# Altium PCB Chocolate_Vending_Machine_V3.2.PcbDoc
Units mil, origin at the board's own origin, x right, y up, seen from the top; angles counter-clockwise.
Board outline 3433.09 x 3078.74 mil, 2 copper layers (Top Layer, Bottom Layer); 16 components, 21 nets, 129 pads, 18 vias.
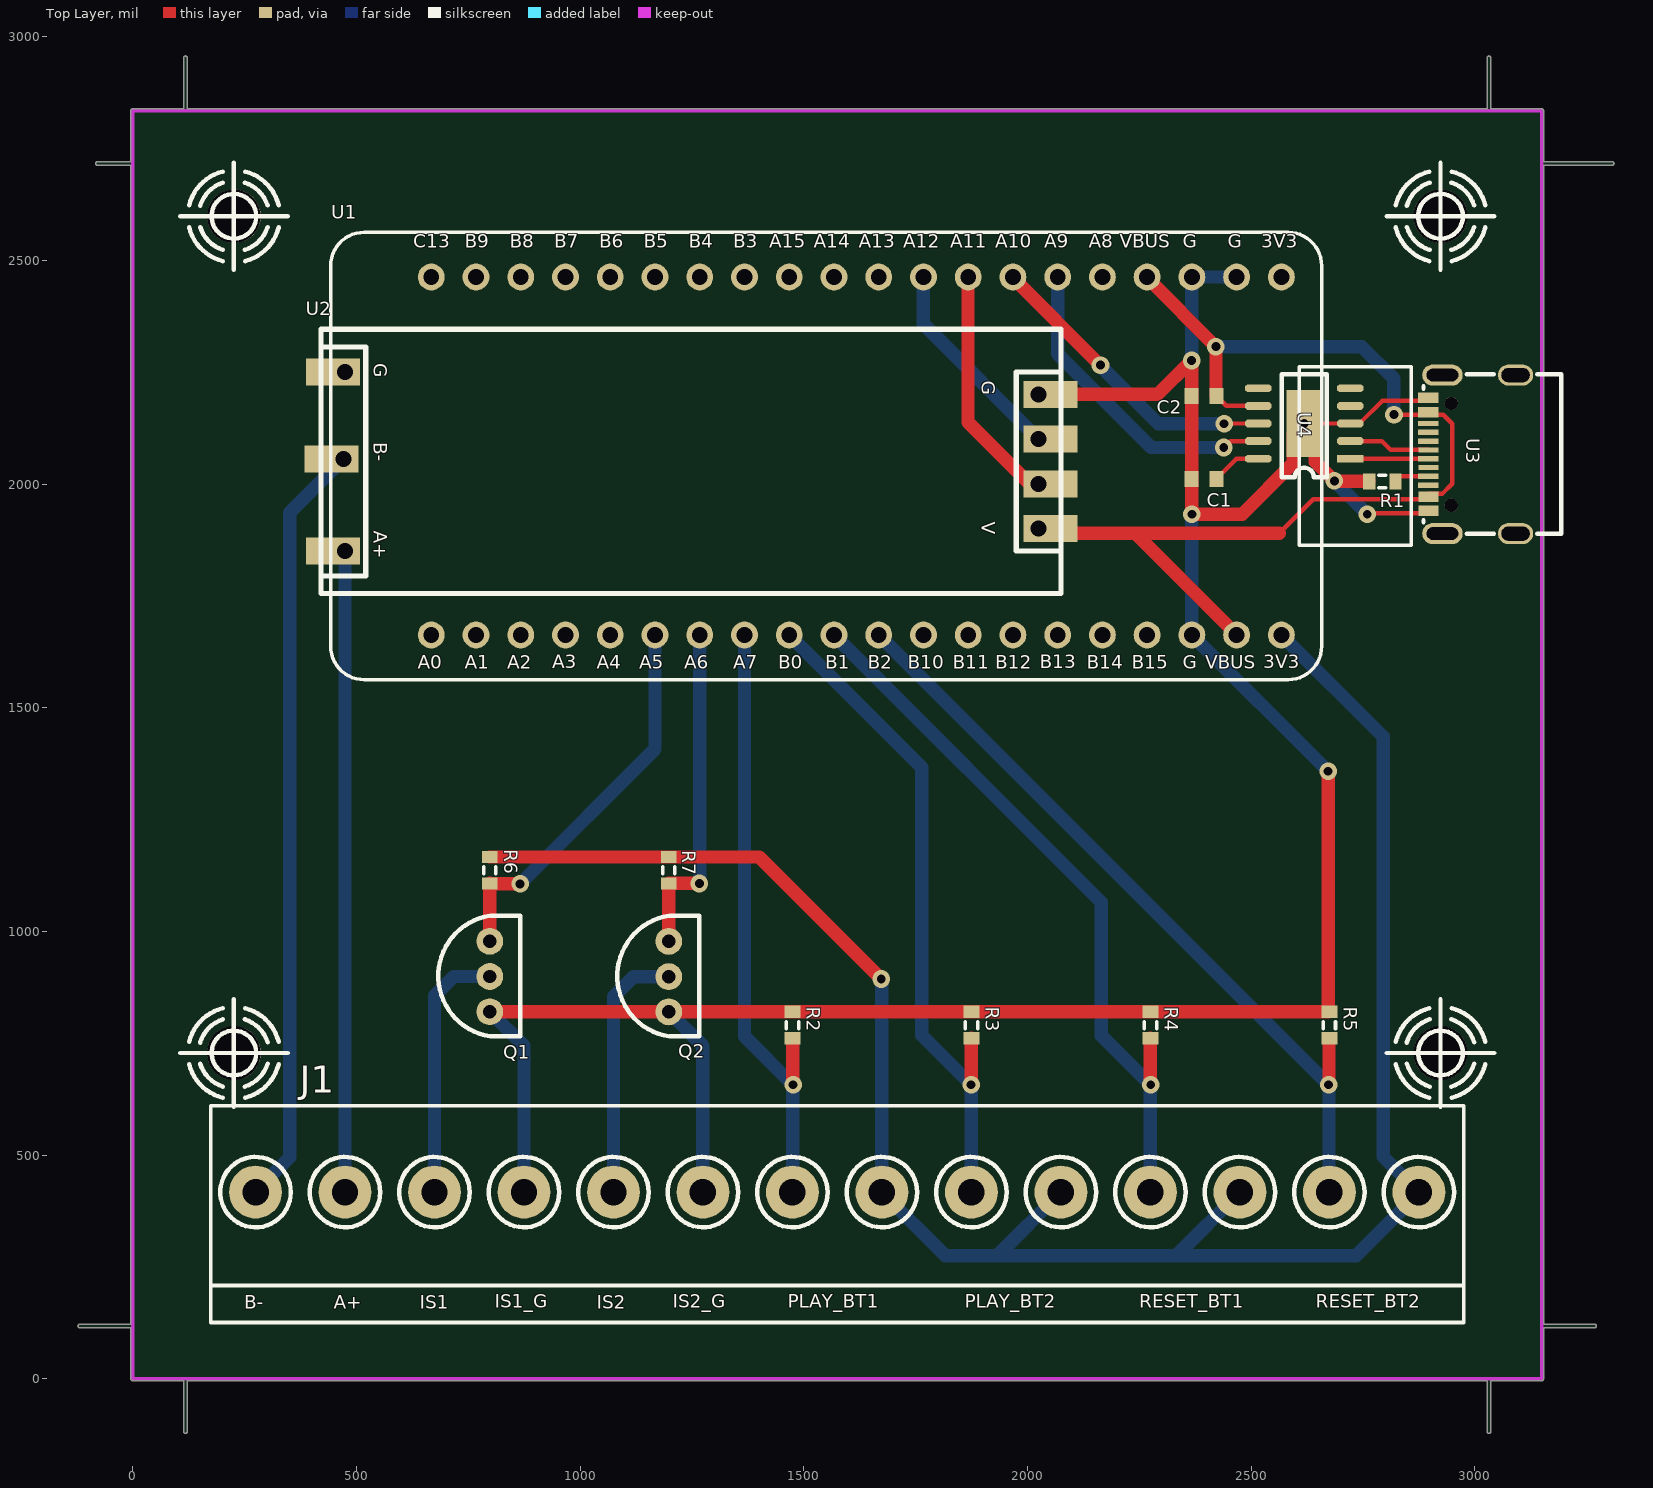
[diagram p0: Top Layer view]
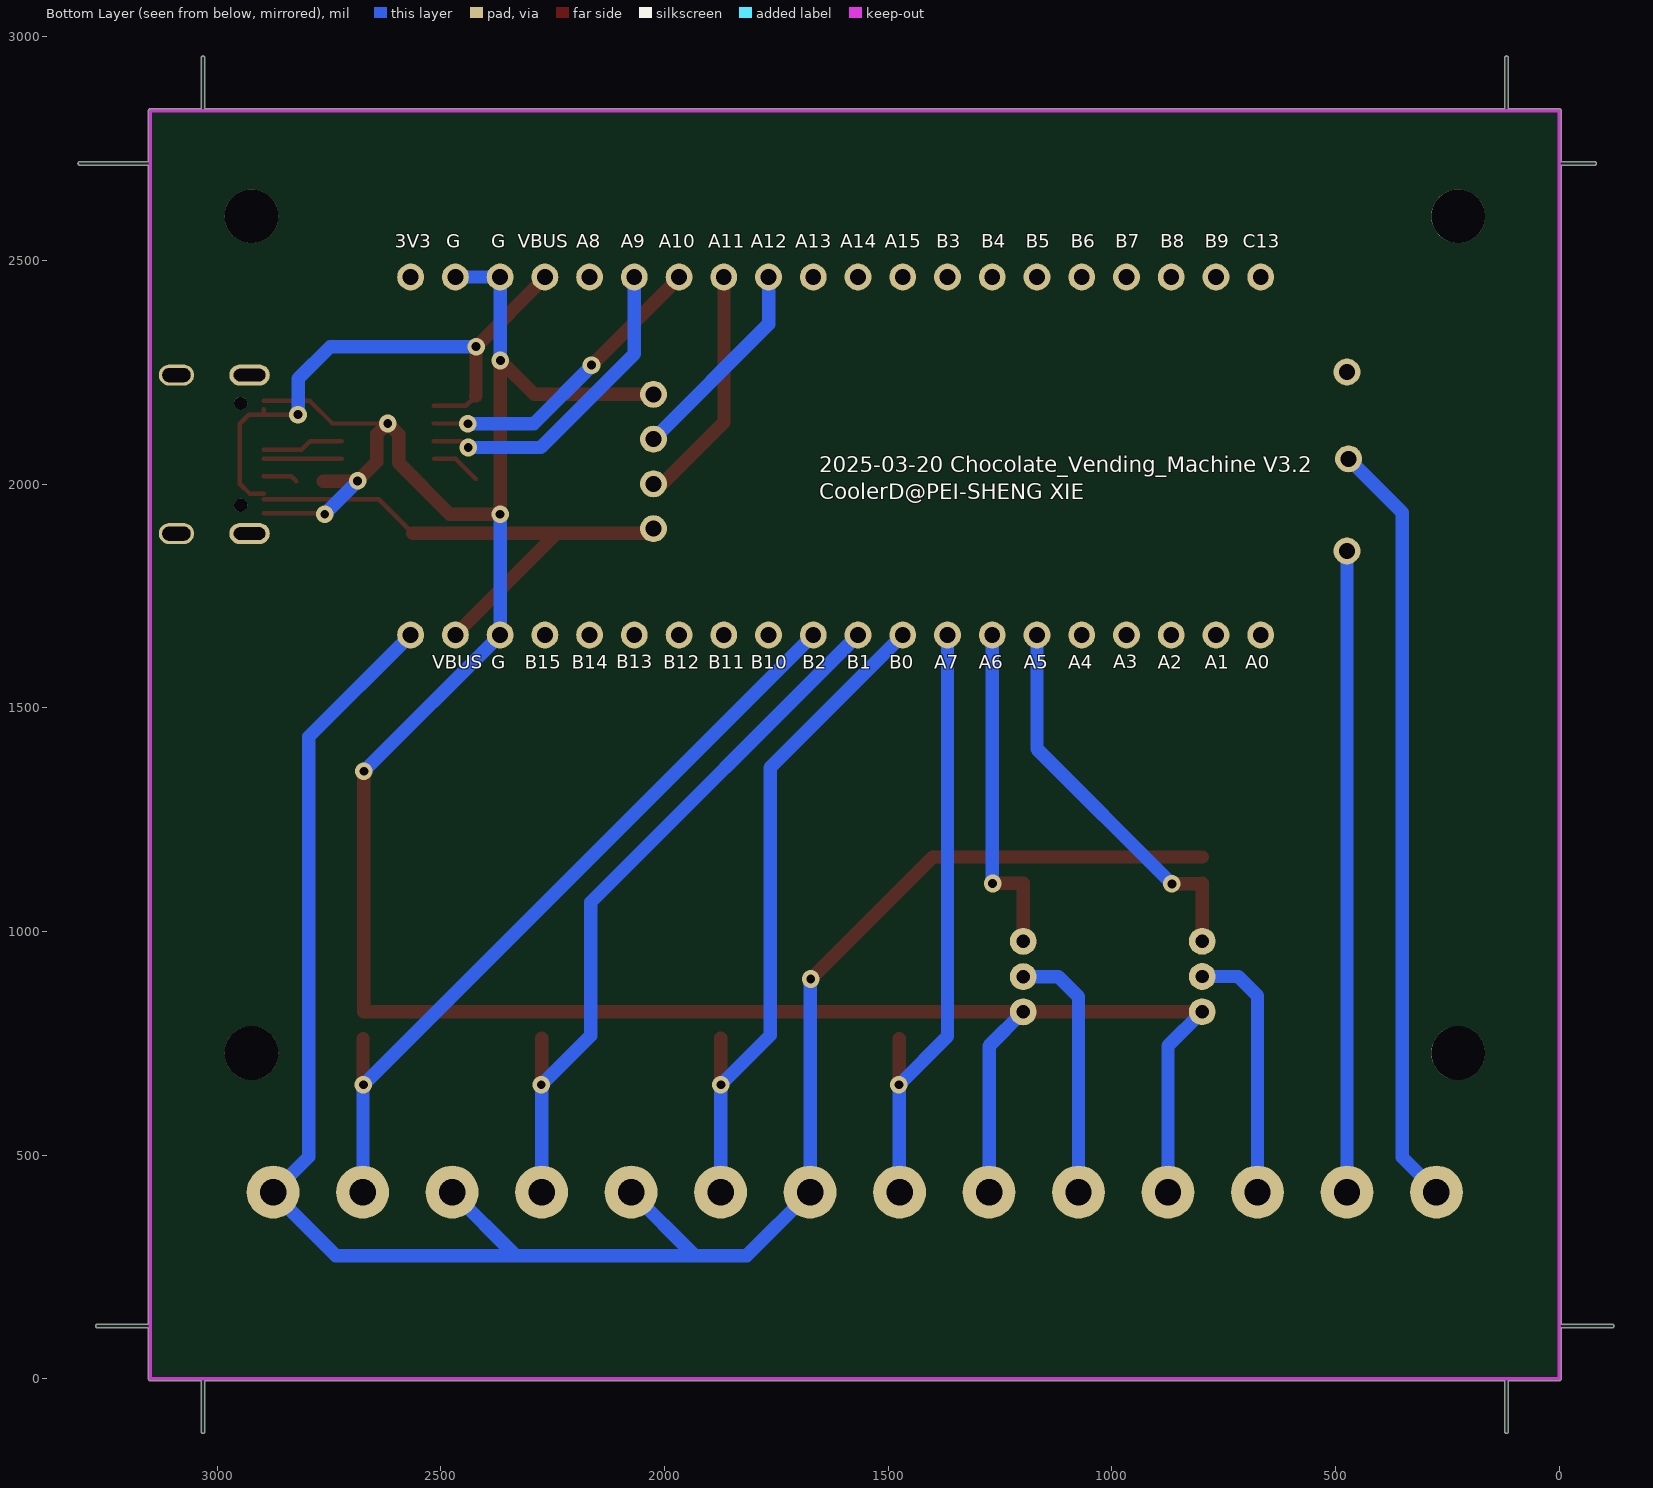
[diagram p1: Bottom Layer view, seen from below]

## Layer stack, top to bottom
Top Solder: solder mask 0.4, Solder Resist, Dk 3.5
Top Layer: signal copper 1.4
Dielectric 1: dielectric 12.6, FR-4, Dk 4.8
Bottom Layer: signal copper 1.4
Bottom Solder: solder mask 0.4, Solder Resist, Dk 3.5

## Board outline
-3.95,0 -3.95,114.16 -118.11,114.16 cw(c-118.11,118.11) -118.11,122.06 -3.95,122.06 -3.95,2712.58 -78.74,2712.58 cw(c-78.74,2716.54) -78.74,2720.49 -3.95,2720.49 -3.95,2834.65 cw(c0,2834.65) 0,2838.6 114.16,2838.6 114.16,2952.76 cw(c118.11,2952.76) 122.06,2952.76 122.06,2838.6 3027.54,2838.6 3027.54,2952.76 cw(c3031.5,2952.76) 3035.45,2952.76 3035.45,2838.6 3149.61,2838.6 cw(c3149.61,2834.65) 3153.56,2834.65 3153.56,2720.49 3307.09,2720.49 cw(c3307.09,2716.54) 3311.04,2716.54 cw(c3307.09,2716.54) 3307.09,2712.58 3153.56,2712.58 3153.56,122.06 3267.72,122.06 cw(c3267.72,118.11) 3271.67,118.11 cw(c3267.72,118.11) 3267.72,114.16 3153.56,114.16 3153.56,0 cw(c3149.61,0) 3149.61,-3.95 3035.45,-3.95 3035.45,-118.11 cw(c3031.5,-118.11) 3027.54,-118.11 3027.54,-3.95 122.06,-3.95 122.06,-118.11 cw(c118.11,-118.11) 114.16,-118.11 114.16,-3.95 0,-3.95 cw(c0,0)

## Design rules (kind name [scope] priority, off if disabled: settings)
Clearance [All] p1: gap=4 ignorepadtopadclearanceinfootprint=FALSE except(0: Arc-Hole Track-Hole SMDPad-Hole THPad-Hole Via-Hole Fill-Hole Poly-Hole Region-Hole Text-Hole)
ComponentClearance [All] p1 off: gap=10 collisioncheckmode=3 verticalgap=10 showdistances=FALSE
PolygonConnect [All] p1: connectstyle=Relief reliefconductorwidth=10 reliefentries=4 polygonreliefangle="90 Angle" airgapwidth=10
RoutingVias [All] p1: holewidth=19.68 width=39.37 viastyle="Through Hole" minholewidth=19.68 minwidth=39.37 maxholewidth=19.68 maxwidth=39.37
SolderMaskExpansion [All] p1: expansion=4 istentingtop=FALSE
Width [All] p1: maxlimit=30 minlimit=7 preferedwidth=10 minimp=50.000000 maximp=50.000000 favimp=50.000000
29 further rules are at their usual default settings.

## Components (designator, comment, footprint, x,y, rotation, side; value= is the part's Value field where it differs from the comment)
C1 "Cap Semi" 1608[0603] 2394.67,2011.39 r180 top value=0.1uF
C2 "Cap Semi" 1608[0603] 2394.67,2196.39 r0 top value=0.1uF
J1 "Terminal_Block_14P" terminal_block_14P 274.8,417.32 r0 top
Q1 "S9013" S9013 798.48,899.42 r0 top
Q2 "S9013" S9013 1198.48,899.15 r0 top
R1 "Res3" J1-0603 2793.31,2005.91 r0 top value=5.1K
R2 "Res3" J1-0603 1474.8,790.76 r90 top value=1K
R3 "Res3" J1-0603 1874.8,790.76 r90 top value=1K
R4 "Res3" J1-0603 2274.8,790.76 r90 top value=1K
R5 "Res3" J1-0603 2674.8,790.76 r90 top value=1K
R6 "Res3" J1-0603 798.4,1136.81 r270 top value=1K
R7 "Res3" J1-0603 1198.4,1136.81 r270 top value=1K
U1 "STM32F411_TYPEC" STM32F411_TypeC 517.61,1562.65 r0 top
U2 "UART_TO_485" UART_TO_RS485 427.67,2346.1 r270 top
U3 "Type_C" Type_C_V2 3031.67,2073.39 r90 top
U4 "CH340K" CH340K_V1 2618.68,2135.27 r180 top

## Footprints (in the part's own frame and the unit in brackets; to place one, negate y for a bottom-side part, rotate by r counter-clockwise, add the part's x,y. Pads: shape width x height; smd on the part's side, far side on the other; paste and mask are expansions set on the pad)
1608[0603] [mm] "Chip Capacitor, Body 1.6x0.8mm, IPC High Density"
  rect 0.8x0.9 smd: 1(-0.7,0) 2(0.7,0)
  body extent -0.87,-0.48 0.87,0.48, height 1.3
CH340K_V1 [mm] "自己畫的"
  rect 2x3.8 smd: 0(0,0)
  rect 1.5x0.45 smd: 1(-2.616,2)
  oct 1.5x0.45 smd: 2(-2.616,1) 3(-2.616,0) 4(-2.616,-1) 5(-2.616,-2) 6(2.616,-2) 7(2.616,-1) 8(2.616,0) 9(2.616,1) 10(2.616,2)
  silkscreen extent -1.27,-2.79 1.27,3.05
J1-0603 [mm] "Chip Resistor, Body 1.6x0.8mm, IPC High Density"
  rect 0.7x0.9 smd: 1(-0.75,0) 2(0.75,0)
  silkscreen extent -0.2,-0.35 0.2,0.35, body extent -0.85,-0.48 0.85,0.48, height 0.9
S9013 [mil] "S9013_TO-92"
  round 60 hole 30: 0(-0.08,-78.87) 1(-0.08,-0.13) 2(-0.08,78.61)
  silkscreen extent -115,-134 68,136
STM32F411_TypeC [mil]
  round 60 hole 35.43: 1(2050,100) 2(1950,100) 3(1850,100) 4(1750,100) 5(1650,100) 6(1550,100) 7(1450,100) 8(1350,100) 9(1250,100) 10(1150,100) 11(1050,100) 12(950,100) 13(850,100) 14(750,100) 15(650,100) 16(550,100) 17(450,100) 18(350,100) 19(250,100) 20(150,100) 21(2050,900) 22(1950,900) 23(1850,900) 24(1750,900) 25(1650,900) 26(1550,900) 27(1450,900) 28(1350,900) 29(1250,900) 30(1150,900) 31(1050,900) 32(950,900) 33(850,900) 34(750,900) 35(650,900) 36(550,900) 37(450,900) 38(350,900) 39(250,900) 40(150,900)
  silkscreen extent -75,0 2340,1000, body extent -79,-4 2344,1004, height 50
terminal_block_14P [mm] "端子台14P,可放字"
  round 3 hole 1.5 paste+0 mask+0.051: 1(0,0) 2(5.08,0) 3(10.16,0) 4(15.24,0) 5(20.32,0) 6(25.4,0) 7(30.48,0) 8(35.56,0) 9(40.64,0) 10(45.72,0) 11(50.8,0) 12(55.88,0) 13(60.96,0) 14(66.04,0)
  silkscreen extent -2.54,-7.4 68.58,4.9
Type_C_V2 [mm] "孟昌學長的"
  oval 1.2x2 hole 0.8 slot 1.6 at 90 deg: 0(-4.678,-1.506) 0(4.322,-1.506)
  oval 1.2x2.3 hole 0.7 slot 1.8 at 90 deg: 0(-4.678,2.644) 0(4.322,2.644)
  rect 0.3x1.15 smd: A1(-3.528,3.442) A4(-2.728,3.44) A5(-1.428,3.444) A6(-0.428,3.444) A7(0.072,3.442) A9(2.372,3.444) A12(3.172,3.444) B1(2.872,3.444) B4(2.072,3.444) B5(1.572,3.444) B6(0.572,3.444) B7(-0.928,3.442) B9(-2.428,3.44) B12(-3.228,3.442)
  rect 0.3x1.148 smd: A8(-1.928,3.444) B8(1.072,3.444)
  round 0.75 hole 0.75 unplated: ""(-3.068,2.144) ""(2.712,2.144)
  silkscreen extent -4.68,-4.11 4.38,3.72, body extent -4.67,-4.06 4.27,3.84, height 3.25
UART_TO_RS485 [mil]
  round 60 hole 35.43: 1(445.71,1597.13) 2(345.71,1597.13) 3(245.71,1597.13) 4(145.71,1597.13) 5(495.71,47.13) 6(289.8,43.58) 7(95.71,47.13)
  rect 60x120 smd: 1(445.71,1623.9) 2(345.71,1623.9) 3(245.71,1623.9) 4(145.71,1623.9) 5(495.71,20.35) 6(289.8,16.81) 7(95.71,20.35)
  silkscreen extent 0,-6 591,1647

## Part data
C1 C2: "Capacitor (Semiconductor SIM Model)", LatestRevisionDate=29-May-2009, LatestRevisionNote="IPC-7351 Footprint Added.", PackageDescription="Chip Capacitor", PackageReference=C1206, Published=8-Jun-2000, Publisher="Altium Limited"
R1 R2 R3 R4 R5 R6 R7: "Resistor", LatestRevisionDate=29-May-2009, LatestRevisionNote="IPC-7351 Footprint Added.", PackageDescription="Chip Resistor", PackageReference=J1-0603, Published=8-Jun-2000, Publisher="Altium Limited"

## Free pads (board coordinates)
  round 120 hole 120: ""(226.38,728.35) ""(226.38,2598.42) ""(2923.23,728.35) ""(2923.23,2598.42)

## Via types
v1: diameter 39.37, hole 19.68, Top Layer to Bottom Layer, tented both sides, 9 vias
v2: diameter 39.37, hole 19.68, Top Layer to Bottom Layer, 9 vias

## Nets (pads, with @x,y where several pads share a name; then routed paths per layer and width w, separated by ;. In a path a pad name is that pad's centre, name@x,y a point inside that pad or via, vN(x,y) a via of type N, cw(c..) or ccw(c..) an arc to the next point about the centre after c; other vN are vias at no path point)
5V: C2.2 U1.2 U1.24 U2.1 U3.A4 U3.A9 U3.B4 U3.B9 U4.7 | length 2514.2
  Top Layer w10: C2.2@2422.39,2196.39 2422.39,2194.26 2432.98,2183.67 2435.11,2183.67 2444.09,2174.69 U4.7@2515.64,2174.69 ; 2562.73,1889.69 2639.06,1966.03 U3.A4 ; v1@2819.45,2154.96 U3.B4 2929.68,2154.96 2949.73,2134.92 2949.73,2000.91 2926.61,1977.8 U3.B9 ; U3.B4@2896.21,2155.08 U3.A9@2896.21,2166.65
  Top Layer w30: U2.1@2024.8,1900.39 2035.5,1889.69 2240.73,1889.69 ; U1.24@2267.61,2460.74 v1(2421.26,2307.09) ; v1@2421.38,2306.97 2421.38,2209.65 2421.48,2209.55 2421.48,2197.13 C2.2@2421.6,2197.01 ; U1.2@2467.61,1662.81 2240.73,1889.69 ; 2562.73,1889.69 2240.73,1889.69
  Bottom Layer w30: v1(2421.26,2307.09) 2747.29,2307.13 2819.17,2235.24 v1@2819.17,2155.4 ; U1.2 U1.2@2467.61,1662.97
  other v1: 2819.17,2155.23
CH340K_Rx: U1.26 U4.9 | length 712.5
  Top Layer w10: v1(2438.98,2081.69) 2453.19,2095.9 U4.9
  Bottom Layer w30: U1.26 2067.61,2290.66 2276.57,2081.69 v1(2438.98,2081.69)
CH340K_Tx: U1.27 U4.8 | length 686.5
  Top Layer w10: v1@2440.23,2135.27 U4.8
  Top Layer w30: U1.27 1967.61,2461.04 2162.89,2265.75 v1(2163.39,2265.75)
  Bottom Layer w30: U1.27@1967.61,2461.59 U1.27 ; v1(2163.39,2265.75) 2163.39,2263.78 2292.52,2134.65 v1(2439.61,2134.65)
GND: C1.2 C2.1 J1.4 J1.6 Q1.0 Q2.0 R1.1 R2.2 R3.2 R4.2 R5.2 U1.3 U1.22 U1.23 U2.4 U3.A1 U3.A12 U3.B1 U3.B12 U4.0 U4.3 | length 6128.4
  Top Layer w10: v2(2618.68,2135.27) U4.3 2742.34,2135.27 2793.52,2186.46 U3.B1 ; v1(2759.61,1932.65) 2761.45,1934.49 U3.A1
  Top Layer w30: Q1.0@798.53,820.42 1198.26,820.42 Q2.0 R2.2@1472.08,820.28 ; R2.2 R3.2 R4.2 2672.08,820.28 v2(2672.08,1358.17) ; U2.4@2024.8,2200.39 2291.39,2200.39 v1(2367,2276) 2367.11,2275.89 C2.1 C1.2 v1@2367.11,1933.14 ; v1(2367.61,1932.65) 2479.89,1932.65 2594.31,2047.06 2594.31,2110.9 v2(2618.68,2135.27) 2643.05,2110.9 2643.05,2049.95 v1(2686,2007) 2686.55,2006.45 R1.1@2763.23,2006.45
  Bottom Layer w30: Q1.0 874.8,744.15 J1.4 ; Q2.0 1274.8,743.89 J1.6 ; v1(2367,2276) 2367.3,2276.3 2367.3,2462.34 U1.23 U1.22 ; U1.3@2367.35,1662.9 v1@2367.35,1932.39 ; U1.3 v2(2672.08,1358.17) ; v1(2686,2007) 2686,2006.63 2759.61,1933.02 v1(2759.61,1932.65)
Infrared_1_Input: Q1.2 R6.2 U1.15 | length 878.6
  Top Layer w30: Q1.2 R6.2 798.89,1106.79 865.65,1106.79 v2(866.14,1106.3)
  Bottom Layer w30: v2(866.14,1106.3) 1167.61,1407.76 U1.15
Infrared_2_Input: Q2.2 R7.2 U1.14 | length 753.6
  Top Layer w30: Q2.2 R7.2 v2(1266.73,1107.28)
  Bottom Layer w30: v2(1266.73,1107.28) 1267.17,1107.72 1267.17,1662.21 U1.14
Infrared_Sensor1: J1.3 Q1.1 | length 580.2
  Bottom Layer w30: J1.3 674.8,855.9 718.19,899.29 Q1.1
Infrared_Sensor2: J1.5 Q2.1 | length 579.1
  Bottom Layer w30: J1.5 1074.8,854.32 1119.5,899.02 Q2.1
NetC1_1: C1.1 U4.10 | length 111.6
  Top Layer w10: C1.1 2466.99,2056.14 U4.10@2515.3,2056.14
NetR1_2: R1.2 U3.A5 | length 77.9
  Top Layer w10: R1.2 2834.1,2017.17 U3.A5
PlayBt_1_Input: J1.7 R2.1 U1.13 | length 1393.3
  Top Layer w30: v2@1475.59,657.48 R2.1@1475.59,760.44
  Bottom Layer w30: U1.13 1367.61,765.46 1475.59,657.48 1475.59,418.11 J1.7
  other v2: 1476.38,657.48
PlayBt_2_Input: J1.9 R3.1 U1.12 | length 1516
  Top Layer w30: v2@1874.8,658.26 R3.1
  Bottom Layer w30: U1.12 1763.78,1366.47 1763.78,768.11 v2@1874.41,657.48 ; J1.9@1874.02,418.1 v2(1874.02,657.48)
ResetBt_1_Input: J1.11 R4.1 U1.11 | length 1642.3
  Top Layer w30: v2@2274.8,657.49 R4.1
  Bottom Layer w30: U1.11 2165.35,1064.9 2165.35,767.34 2275.2,657.49 2274.8,657.09 J1.11
  other v2: 2275.59,657.48
ResetBt_2_Input: J1.13 R5.1 U1.10 | length 1765.7
  Top Layer w30: v2(2673.23,657.48) 2674.01,658.26 R5.1@2674.01,760.45
  Bottom Layer w30: U1.10 2672.77,657.48 v2(2673.23,657.48) 2674.01,656.7 J1.13@2674.01,417.32
RS485_A+: J1.2 U2.5 | length 1433.1
  Bottom Layer w30: J1.2 U2.5@474.8,1850.39
RS485_B-: J1.1 U2.6 | length 1719.5
  Bottom Layer w30: J1.1@274.09,418.03 351.38,495.31 351.38,1936.43 U2.6@470.93,2055.98
RS485_Rx: U1.29 U2.3 | length 468.8
  Bottom Layer w30: U1.29 1767.61,2357.58 U2.3@2024.8,2100.39
RS485_Tx: U1.28 U2.2 | length 539.6
  Top Layer w30: U1.28 1867.13,2462.17 1867.13,2137.8 2004.53,2000.39 U2.2@2024.8,2000.39
Terminal_Block_8: J1.8 J1.10 J1.12 J1.14 R6.1 R7.1 U1.1 | length 4554.9
  Top Layer w30: R6.1 R7.1 1400.59,1166.34 v2(1673.23,893.7)
  Bottom Layer w30: v2(1673.23,893.7) 1674.01,892.92 1674.01,418.11 J1.8 1816.53,275.59 1933.06,275.59 ; J1.10 1933.06,275.59 ; J1.12 2333.06,275.59 ; U1.1 2795.28,1434.98 2795.28,496.84 J1.14 ; J1.14@2874.8,415.53 2734.86,275.59 2333.06,275.59 ; 1933.06,275.59 2333.06,275.59
UD+: U3.A6 U4.1 | length 174.4
  Top Layer w10: U4.1 U3.A6
UD-: U3.A7 U4.2 | length 182.6
  Top Layer w10: U4.2 2792.35,2095.9 2812.03,2076.22 U3.A7
pads on no net: U1.4 U1.5 U1.6 U1.7 U1.8 U1.9 U1.16 U1.17 U1.18 U1.19 U1.20 U1.21 U1.25 U1.30 U1.31 U1.32 U1.33 U1.34 U1.35 U1.36 U1.37 U1.38 U1.39 U1.40 U2.7 U3. U3.0 U3.A8 U3.B5 U3.B6 U3.B7 U3.B8 U4.4 U4.5 U4.6

## Keep-outs
Keep-Out Layer:
  lines w7.87: 0,0 0,2834.65 3149.61,2834.65 3149.61,0 0,0

## Silkscreen, mask and mechanical layers (free items; w line width, h text height)
Top Overlay:
  circle w10: c2923.23,728.35 r50
  circle w10: c226.38,728.35 r50
  circle w10: c226.38,2598.43 r50
  circle w10: c2923.23,2598.43 r50
  lines w10: 106.38,728.35 346.38,728.35 ; 106.38,2598.43 346.38,2598.43 ; 126.36,703.41 ccw(c226.38,728.35) 201.44,628.33 ; 126.36,753.29 cw(c226.38,728.35) 201.44,828.37 ; 126.36,2573.49 ccw(c226.38,2598.43) 201.44,2498.41 ; 126.36,2623.36 cw(c226.38,2598.43) 201.44,2698.44 ; 150.79,751.53 cw(c226.38,728.35) 201.95,803.54 ; 150.79,2621.6 cw(c226.38,2598.43) 201.95,2673.61 ; 151.19,703.92 ccw(c226.38,728.35) 201.95,653.16 ; 151.19,2574 ccw(c226.38,2598.43) 201.95,2523.24 ; 226.38,608.35 226.38,848.35 ; 226.38,2478.43 226.38,2718.43 ; 250.81,653.16 ccw(c226.38,728.35) 301.57,703.92 ; 250.81,803.54 cw(c226.38,728.35) 301.57,752.78 ; 250.81,2523.24 ccw(c226.38,2598.43) 301.57,2574 ; 250.81,2673.61 cw(c226.38,2598.43) 301.57,2622.86 ; 251.31,628.33 ccw(c226.38,728.35) 326.39,703.41 ; 251.31,828.37 cw(c226.38,728.35) 326.39,753.29 ; 251.31,2498.41 ccw(c226.38,2598.43) 326.39,2573.49 ; 251.31,2698.44 cw(c226.38,2598.43) 326.39,2623.36 ; 2803.23,728.35 3043.23,728.35 ; 2803.23,2598.43 3043.23,2598.43 ; 2823.21,703.41 ccw(c2923.23,728.35) 2898.29,628.33 ; 2823.21,753.28 cw(c2923.23,728.35) 2898.29,828.36 ; 2823.21,2573.49 ccw(c2923.23,2598.43) 2898.29,2498.41 ; 2823.21,2623.36 cw(c2923.23,2598.43) 2898.29,2698.44 ; 2847.65,751.53 cw(c2923.23,728.35) 2898.8,803.54 ; 2847.65,2621.6 cw(c2923.23,2598.43) 2898.8,2673.61 ; 2848.04,703.92 ccw(c2923.23,728.35) 2898.8,653.16 ; 2848.04,2574 ccw(c2923.23,2598.43) 2898.8,2523.24 ; 2923.23,608.35 2923.23,848.35 ; 2923.23,2478.43 2923.23,2718.43 ; 2947.66,653.16 ccw(c2923.23,728.35) 2998.42,703.92 ; 2947.66,803.54 cw(c2923.23,728.35) 2998.42,752.78 ; 2947.66,2523.24 ccw(c2923.23,2598.43) 2998.42,2574 ; 2947.66,2673.61 cw(c2923.23,2598.43) 2998.42,2622.86 ; 2948.17,628.33 ccw(c2923.23,728.35) 3023.24,703.41 ; 2948.17,828.36 cw(c2923.23,728.35) 3023.24,753.28 ; 2948.17,2498.41 ccw(c2923.23,2598.43) 3023.24,2573.49 ; 2948.17,2698.44 cw(c2923.23,2598.43) 3023.24,2623.36
  text "IS1_G" at 809.82,158.77 h30
  text "IS2_G" at 1207.32,158.77 h30
  text "PLAY_BT1" at 1464.83,158.77 h30
  text "PLAY_BT2" at 1859.83,158.77 h30
  text "RESET_BT1" at 2249.84,158.77 h30
  text "RESET_BT2" at 2644.45,158.77 h30
  text "B-" at 249.8,156.27 h30
  text "A+" at 449.8,156.27 h30
  text "IS1" at 642.31,156.27 h30
  text "IS2" at 1037.31,156.27 h30
Bottom Overlay:
  text "2025-03-20 Chocolate_Vending_Machine V3.2 / CoolerD@PEI-SHENG XIE" at 1654.69,1953.86 h60
Mechanical 1:
  lines w7.87: -118.11,118.11 3267.72,118.11 ; -78.74,2716.54 3307.09,2716.54 ; 118.11,-118.11 118.11,2952.76 ; 3031.5,-118.11 3031.5,2952.76
  lines w10: -98.74,60 -78.74,0 ; -98.74,2774.65 -78.74,2834.65 ; -88.74,0 -68.74,0 ; -88.74,2834.65 -68.74,2834.65 ; -78.74,1216.38 -78.74,0 ; -78.74,1618.26 -78.74,2834.65 ; -58.74,60 -78.74,0 ; -58.74,2774.65 -78.74,2834.65 ; 0,-98.74 0,-78.74 ; 60,-108.74 0,-88.74 ; 60,-68.74 0,-88.74 ; 1373.86,-88.74 0,-88.74 ; 1775.74,-88.74 3149.61,-88.74 ; 3089.61,-108.74 3149.61,-88.74 ; 3089.61,-68.74 3149.61,-88.74 ; 3149.61,-98.74 3149.61,-78.74
  text "72 (mm)" at -42.75,1226.38 h60 r90
  text "80 (mm)" at 1383.86,-124.73 h60

## Text inside footprints (layer, text, board x,y; h text height)
U1: Top Overlay "A0" at 637.61,1577.6 h51.18; Top Overlay "A1" at 742.61,1577.06 h51.18; Top Overlay "A2" at 837.61,1577.06 h51.18; Top Overlay "A3" at 937.61,1577.65 h51.18; Top Overlay "A7" at 1342.61,1577.06 h51.18; Top Overlay "A6" at 1232.61,1577.6 h51.18; Top Overlay "A5" at 1132.61,1577.6 h51.18; Top Overlay "A4" at 1037.61,1577.06 h51.18; Top Overlay "B10" at 1732.61,1577.6 h51.18; Top Overlay "B2" at 1642.61,1577.06 h51.18; Top Overlay "B1" at 1547.61,1577.06 h51.18; Top Overlay "B0" at 1442.61,1577.6 h51.18; Top Overlay "B14" at 2132.61,1577.06 h51.18; Top Overlay "B13" at 2027.61,1577.65 h51.18; Top Overlay "B12" at 1927.61,1577.06 h51.18; Top Overlay "B11" at 1832.61,1577.06 h51.18; Top Overlay "3V3" at 2527.61,1577.65 h51.18; Top Overlay "VBUS" at 2397.61,1577.06 h51.18; Top Overlay "G" at 2347.61,1577.6 h51.18; Top Overlay "B15" at 2232.61,1577.6 h51.18; Top Overlay "VBUS" at 2206,2518.21 h51.18; Top Overlay "G" at 2347.61,2517.65 h51.18; Top Overlay "G" at 2447.61,2517.65 h51.18; Top Overlay "3V3" at 2522.61,2518.09 h51.18; Top Overlay "A11" at 1827.61,2518.09 h51.18; Top Overlay "A10" at 1927.61,2518.09 h51.18; Top Overlay "A9" at 2037.61,2518.09 h51.18; Top Overlay "A8" at 2137.61,2518.09 h51.18; Top Overlay "A15" at 1422.61,2518.09 h51.18; Top Overlay "A14" at 1522.61,2518.09 h51.18; Top Overlay "A13" at 1622.61,2518.09 h51.18; Top Overlay "A12" at 1722.61,2518.09 h51.18; Top Overlay "B6" at 1042.61,2518.09 h51.18; Top Overlay "B5" at 1142.61,2518.21 h51.18; Top Overlay "B4" at 1242.61,2518.21 h51.18; Top Overlay "B3" at 1342.61,2518.09 h51.18; Top Overlay "B7" at 942.61,2518.21 h51.18; Top Overlay "B8" at 842.61,2518.09 h51.18; Top Overlay "C13" at 627.61,2517.65 h51.18; Top Overlay "B9" at 742.61,2518.09 h51.18; Bottom Overlay "G" at 2387.61,2517.65 h51.18; Bottom Overlay "A9" at 2097.61,2518.09 h51.18; Bottom Overlay "B6" at 1092.61,2518.09 h51.18; Bottom Overlay "G" at 2487.61,2517.65 h51.18; Bottom Overlay "3V3" at 2602.61,2518.09 h51.18; Bottom Overlay "VBUS" at 2327.61,2518.21 h51.18; Bottom Overlay "A8" at 2197.61,2518.09 h51.18; Bottom Overlay "A11" at 1902.61,2518.09 h51.18; Bottom Overlay "A10" at 2012.61,2518.09 h51.18; Bottom Overlay "A12" at 1807.61,2518.09 h51.18; Bottom Overlay "A15" at 1507.61,2518.09 h51.18; Bottom Overlay "A13" at 1707.61,2518.09 h51.18; Bottom Overlay "B4" at 1292.61,2518.21 h51.18; Bottom Overlay "B3" at 1392.61,2518.09 h51.18; Bottom Overlay "B7" at 992.61,2518.21 h51.18; Bottom Overlay "B8" at 892.61,2518.09 h51.18; Bottom Overlay "C13" at 707.61,2517.65 h51.18; Bottom Overlay "A14" at 1607.61,2518.09 h51.18; Bottom Overlay "B5" at 1192.61,2518.21 h51.18; Bottom Overlay "B9" at 792.61,2518.09 h51.18; Bottom Overlay "A0" at 702.61,1577.6 h51.18; Bottom Overlay "A4" at 1097.61,1577.06 h51.18; Bottom Overlay "B0" at 1497.61,1577.6 h51.18; Bottom Overlay "A1" at 792.61,1577.06 h51.18; Bottom Overlay "A3" at 997.61,1577.65 h51.18; Bottom Overlay "A6" at 1297.61,1577.6 h51.18; Bottom Overlay "A7" at 1397.61,1577.06 h51.18; Bottom Overlay "B1" at 1592.61,1577.06 h51.18; Bottom Overlay "B2" at 1692.61,1577.06 h51.18; Bottom Overlay "B11" at 1902.61,1577.06 h51.18; Bottom Overlay "B12" at 2002.61,1577.06 h51.18; Bottom Overlay "B15" at 2312.61,1577.6 h51.18; Bottom Overlay "G" at 2387.61,1577.6 h51.18; Bottom Overlay "VBUS" at 2519.22,1577.06 h51.18; Bottom Overlay "A5" at 1197.61,1577.6 h51.18; Bottom Overlay "A2" at 897.61,1577.06 h51.18; Bottom Overlay "B13" at 2107.61,1577.65 h51.18; Bottom Overlay "B10" at 1807.61,1577.6 h51.18; Bottom Overlay "B14" at 2207.61,1577.06 h51.18
U2: Top Overlay "G" at 1897.63,2230.71 h30 r270; Top Overlay "V" at 1897.63,1915.75 h30 r270; Top Overlay "G" at 539.36,2270.08 h30 r270; Top Overlay "B-" at 539.36,2092.91 h30 r270; Top Overlay "A+" at 539.36,1896.06 h30 r270